# Altium PCB main.PcbDoc
Units mil, origin at the board's own origin, x right, y up, seen from the top; angles counter-clockwise.
Board outline 2720 x 2245 mil, 2 copper layers (Top Layer, Bottom Layer); 21 components, 31 nets, 106 pads, 2 vias.
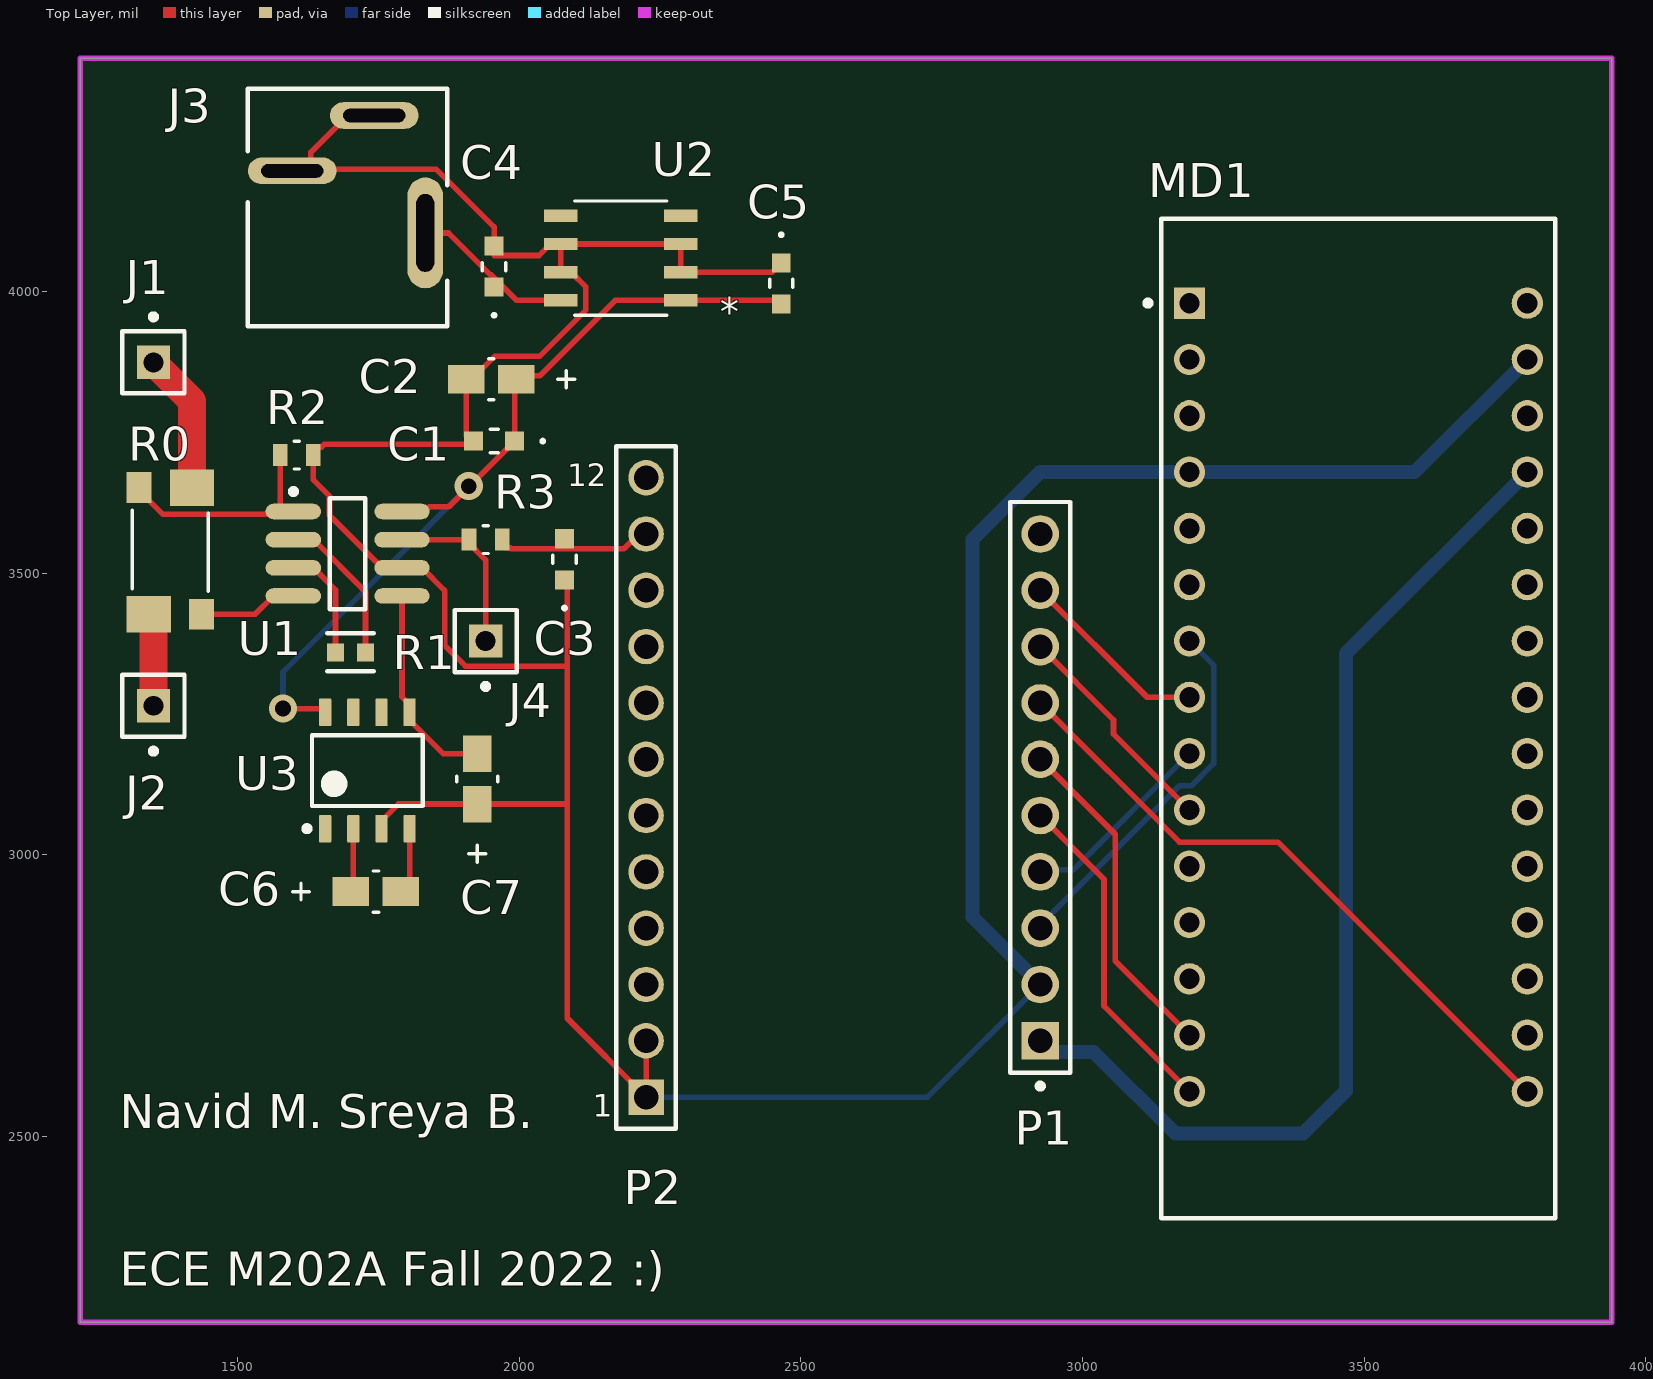
[diagram p0: Top Layer view]
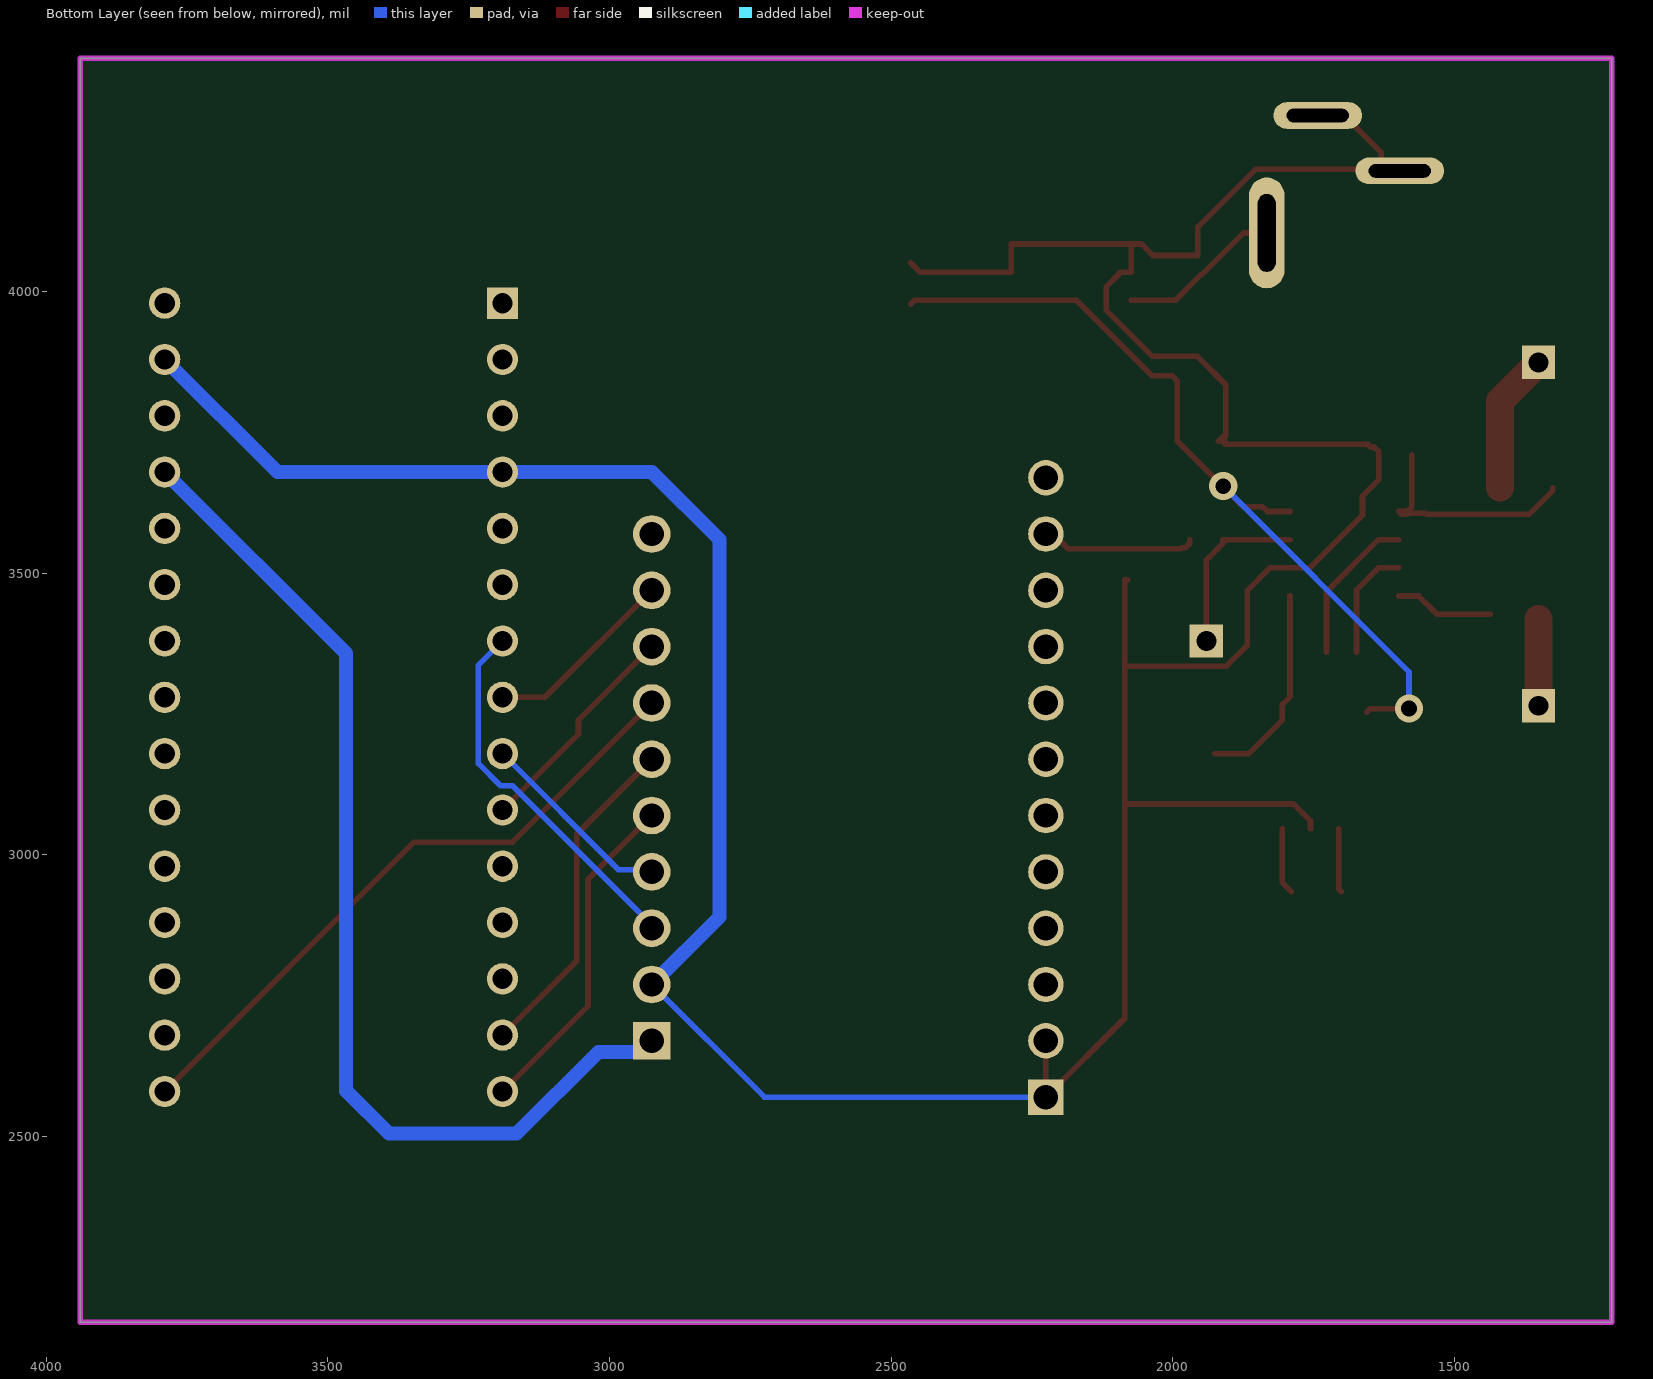
[diagram p1: Bottom Layer view, seen from below]
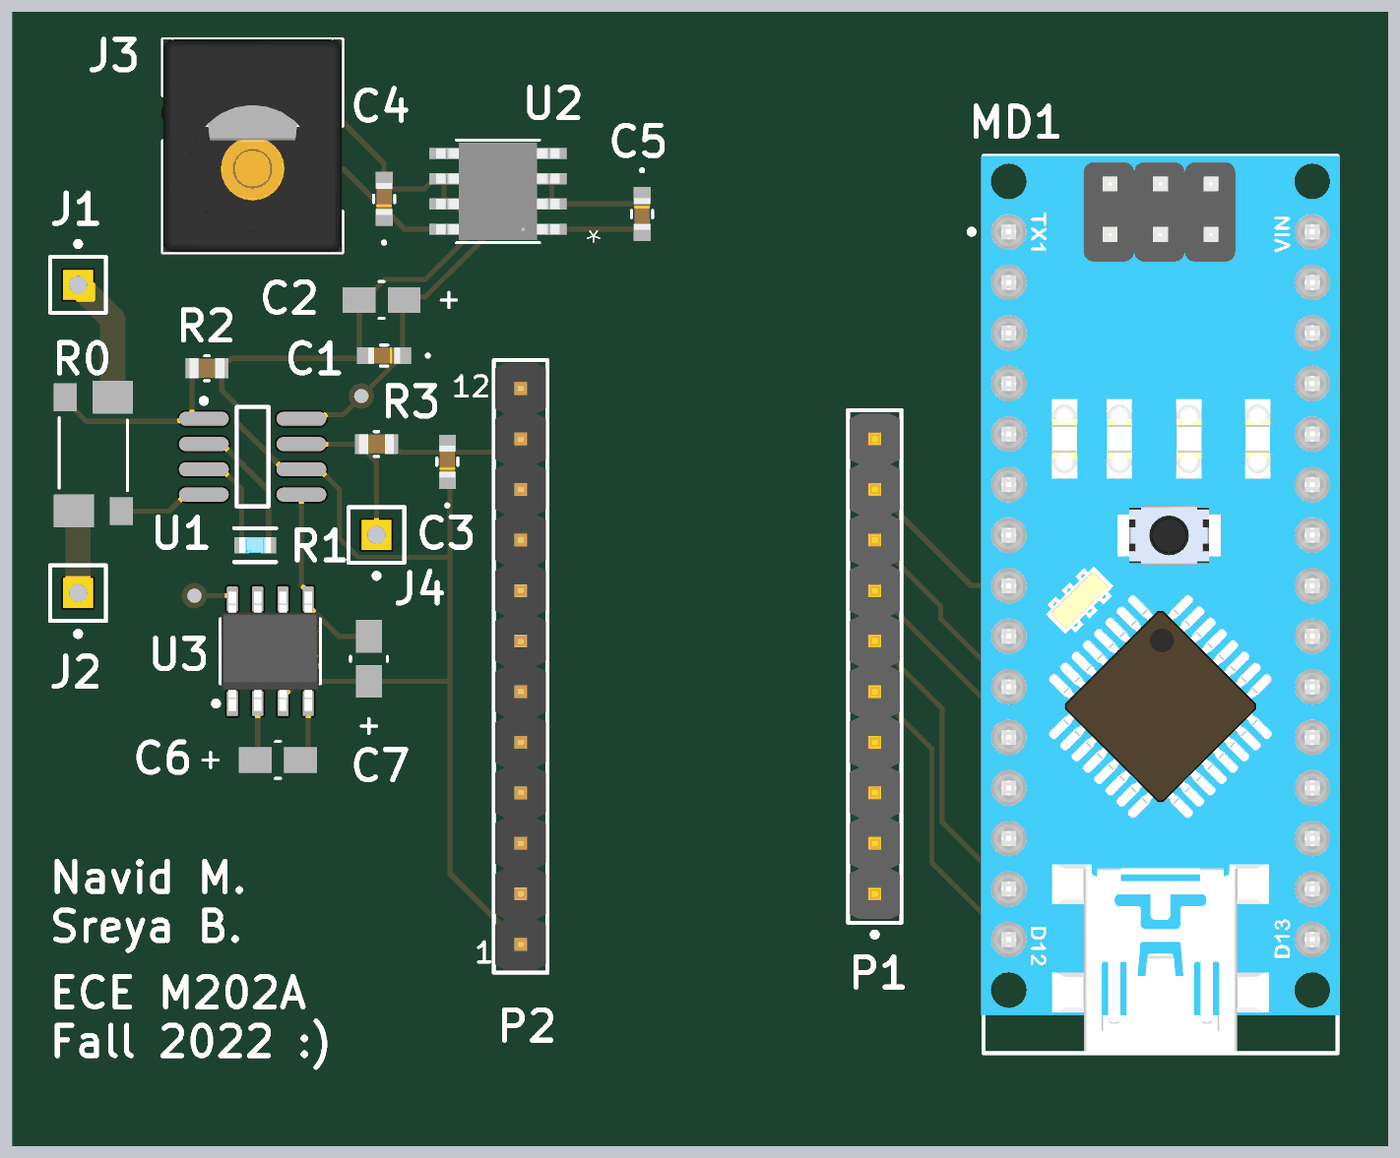
[diagram p2: 3D render of the assembled board from above, using the file's embedded part models]

## Layer stack, top to bottom
Top Solder: solder mask 0.4, Solder Resist, Dk 3.5
Top Layer: signal copper 1.4
Dielectric 1: dielectric 12.6, FR-4, Dk 4.8
Bottom Layer: signal copper 1.4
Bottom Solder: solder mask 0.4, Solder Resist, Dk 3.5

## Board outline
1220,2170 1220,4415 3940,4415 3940,2170

## Design rules (kind name [scope] priority, off if disabled: settings)
Clearance [All] p1: gap=10 ignorepadtopadclearanceinfootprint=FALSE except(0: Arc-Hole Track-Hole SMDPad-Hole THPad-Hole Via-Hole Fill-Hole Poly-Hole Region-Hole Text-Hole)
HoleSize [All] p1: absolutevalues=TRUE maxlimit=150 minlimit=1 maxpercent=80.000 minpercent=20.000
PolygonConnect [All] p1: connectstyle=Relief reliefconductorwidth=10 reliefentries=4 polygonreliefangle="90 Angle" airgapwidth=10
RoutingVias [All] p1: holewidth=28 width=50 viastyle="Through Hole" minholewidth=28 minwidth=50 maxholewidth=28 maxwidth=50
SolderMaskExpansion [All] p1: expansion=4 istentingtop=FALSE
Width [All] p1: maxlimit=100 minlimit=10 preferedwidth=10
29 further rules are at their usual default settings.

## Components (designator, comment, footprint, x,y, rotation, side; value= is the part's Value field where it differs from the comment)
C1 "0.1uF" CAP_0603M 1955,3735 r180 top
C2 "10uF" CAP_1206M 1950,3845 r180 top
C3 "1.5uF" CAP_0603M 2080,3525 r90 top
C4 "0.33uF" CAP_0603M 1955,4045 r90 top
C5 "0.1uF" CAP_0603M 2465,4015 r270 top
C6 "10uF" CAP_1206M 1745,2935 r0 top
C7 "10uF" CAP_1206M 1925,3135 r90 top
J1 "Socket" PIN1 1350,3875 r0 top
J2 "Socket" PIN1 1350,3265 r180 top
J3 "694106402002" 694106402002 1695,4150 r180 top
J4 "Socket" PIN1 1940,3380 r180 top
MD1 "A000005" FP-A000005-MFG 3490,3242.5 r0 top
P1 "61301011121" FP-61301011121-MFG 2925,3120 r90 top
P2 "61301211121" 61301211121 2225,3120 r90 top
R0 "0.01Ohm" Y1487B_VIS 1380,3540 r90 top
R1 "499R" FP-RK73H1J-IPC_C 1700,3360 r180 top
R2 "1K" RES_0603 1604.5,3710 r180 top
R3 "1K" RES_0603 1940,3560 r180 top
U1 "AD8221ARZ-R7" ADI-R-8_M 1695,3535 r0 top
U2 "MC78L09ACDR2G" SOIC8_ONS 2180,4060 r180 top
U3 "LMC7660IMX" D0008A_L 1730,3150 r90 top

## Footprints (in the part's own frame and the unit in brackets; to place one, negate y for a bottom-side part, rotate by r counter-clockwise, add the part's x,y. Pads: shape width x height; smd on the part's side, far side on the other; paste and mask are expansions set on the pad)
61301211121 [mm] "Pin Header, pitch 2.54 mm, THT, Vertical, single row, 12p"
  rect 1.6x1.6 hole 1.1: 1(-13.97,0)
  round 1.6 hole 1.1: 2(-11.43,0) 3(-8.89,0) 4(-6.35,0) 5(-3.81,0) 6(-1.27,0) 7(1.27,0) 8(3.81,0) 9(6.35,0) 10(8.89,0) 11(11.43,0) 12(13.97,0)
  silkscreen extent -15.39,-1.35 15.39,1.35, body extent -15.24,-1.27 15.24,1.27, height 8.57
694106402002 [mm] "DC Power Jack Vertical THT ?6.4"
  oval 1.6x5 hole 0.8 slot 3.5 at 90 deg: 1(-3.5,1.15)
  oval 4x1.2 hole 0.6 slot 2.8 at 0 deg: 2(-1.2,-4.15) 3(2.5,-1.65)
  silkscreen extent -4.5,-5.35 4.5,5.35, body extent -4.5,-5.35 4.5,5.35, height 14.1
ADI-R-8_M [mm] "SOIC, 8-Leads, Body 4.9x3.9mm, Pitch 1.27mm, IPC Low Density"
  oval 2.5x0.7 smd: 1(-2.45,1.905) 2(-2.45,0.635) 3(-2.45,-0.635) 4(-2.45,-1.905) 5(2.45,-1.905) 6(2.45,-0.635) 7(2.45,0.635) 8(2.45,1.905)
  silkscreen extent -2.57,-2.5 0.8,2.93, body extent -2,-2.5 2,2.5, height 1.75
CAP_0603M [mil]
  rect 33.81x33.5 smd paste+0 mask+0: 1(-36.59,0) 2(36.59,0)
  silkscreen extent -89,-21 7,21, body extent -31,-16 31,16, height 35
CAP_1206M [mm]
  rect 1.646x1.3 smd paste+0 mask+0: 1(-1.131,0) 2(1.131,0)
  silkscreen extent -3.76,-0.93 0.12,0.93, body extent 0,0 0.25,0.25, height 0.25
D0008A_L [mm] "SOIC, 8-Leads, Body 5x4mm, Pitch 1.27mm, IPC High Density"
  rrect18% 1.25x0.55 smd: 1(-2.625,1.905) 2(-2.625,0.635) 3(-2.625,-0.635) 4(-2.625,-1.905) 5(2.625,-1.905) 6(2.625,-0.635) 7(2.625,0.635) 8(2.625,1.905)
  silkscreen extent -2.75,-2.5 1.6,2.85, body extent -3,-2.45 3,2.45, height 1.63
FP-61301011121-MFG [mm]
  rect 1.7x1.7 hole 1.1 paste-1000 mask+0: 1(-11.43,0)
  round 1.7 hole 1.1 paste-1000 mask+0: 2(-8.89,0) 3(-6.35,0) 4(-3.81,0) 5(-1.27,0) 6(1.27,0) 7(3.81,0) 8(6.35,0) 9(8.89,0) 10(11.43,0)
  silkscreen extent -13.6,-1.35 12.88,1.35, body extent -12.98,-1.45 12.98,1.45, height 0.25
FP-A000005-MFG [mil]
  rect 55.67x55.67 hole 35.98 paste-39370.1 mask+0: 1(-300,737.5)
  round 55.67 hole 35.98 paste-39370.1 mask+0: 2(-300,637.5) 3(-300,537.5) 4(-300,437.5) 5(-300,337.5) 6(-300,237.5) 7(-300,137.5) 8(-300,37.5) 9(-300,-62.5) 10(-300,-162.5) 11(-300,-262.5) 12(-300,-362.5) 13(-300,-462.5) 14(-300,-562.5) 15(-300,-662.5) 16(300,-662.5) 17(300,-562.5) 18(300,-462.5) 19(300,-362.5) 20(300,-262.5) 21(300,-162.5) 22(300,-62.5) 23(300,37.5) 24(300,137.5) 25(300,237.5) 26(300,337.5) 27(300,437.5) 28(300,537.5) 29(300,637.5) 30(300,737.5)
  silkscreen extent -379,-888 350,888, body extent -354,-891 354,891, height 10
FP-RK73H1J-IPC_C [mil]
  rect 29.75x31.97 smd paste+0 mask+0: 1(-26.59,0) 2(26.59,0)
  silkscreen extent -41,-33 41,33, body extent -45,-22 45,22, height 10
PIN1 [mm] "Connector; Plug"
  rect 1.5x1.5 hole 0.9: 1(0,0)
  silkscreen extent -1.4,-1.4 1.4,2.17
RES_0603 [mil]
  rect 26x39 smd paste+0 mask+0: 1(-29.5,0) 2(29.5,0)
  silkscreen extent -4,-24 4,24, body extent -34,-19 34,19, height 30
SOIC8_ONS [mil]
  rect 59x22 smd paste+0 mask+0: 1(-106.5,75) 2(-106.5,25) 3(-106.5,-25) 4(-106.5,-75) 5(106.5,-75) 6(106.5,-25) 7(106.5,25) 8(106.5,75)
  silkscreen extent -82,-102 82,102, body extent -122,-96 122,96, height 69
Y1487B_VIS [mil]
  rect 65x79 smd paste+0 mask+0: 1(-112.5,38.5) 4(112.5,-38.5)
  rect 55x45 smd paste+0 mask+0: 2(-112.5,-55.5) 3(112.5,55.5)
  silkscreen extent -72,-68 72,68, body extent 0,0 10,10, height 10

## Part data
C1 C5: library part CAP_0603M, "0.1uF 0603", Manufacturer_Part_Number=0603YC683KAT2A, Mfr_Name="KYOCERA AVX", Copyright="Copyright (C) 2022 Ultra Librarian. All rights reserved.", RefDes=RefDes, Type=DEV
C2 C6 C7: library part CAP_1206M, "No Description Available", Manufacturer_Part_Number=SMC1206K183, Mfr_Name="NTE Electronics", Copyright="Copyright (C) 2022 Ultra Librarian. All rights reserved.", Digi-Key_Part_Number_1=2368-SMC1206K183-ND, RefDes=RefDes, Type=DEV
C3: library part CAP_0603M, "1.5uF 0603", Manufacturer_Part_Number=0603YC683KAT2A, Mfr_Name="KYOCERA AVX", Copyright="Copyright (C) 2022 Ultra Librarian. All rights reserved.", RefDes=RefDes, Type=DEV
C4: library part CAP_0603M, "0.33uF 0603", Manufacturer_Part_Number=0603YC683KAT2A, Mfr_Name="KYOCERA AVX", Copyright="Copyright (C) 2022 Ultra Librarian. All rights reserved.", RefDes=RefDes, Type=DEV
J3: library part CMP-1502-00189-1, "DC Power Jack Connector WR-DC, Male, Vertical, THT, 3 A, 20 V", Manufacturer="Wurth Elektronik", Operating Temperature=-40to85degC, Rated Current=3A, Working Voltage=20V, Datasheet URL=http://katalog.we-online.de/em/datasheet/6941xx402002.pdf, Gender=Male, Manufacturer URL=http://www.we-online.de, Mounting Technology=THT, Opening Diameter=6.4mm, Orientation=Vertical, Package Reference=694106402002, Packaging=Bag, Part Number=694106402002, Plug Inner Diameter=2.05mm, Plug Outer Diameter=5.5mm, Publisher=WurthElektronik
MD1: library part CMP-189986-000002-1, "ARDUINO NANO ATMEGA328 EVAL BRD", Operating Supply Voltage=12V, Package Quantity=50, Core Architecture=AVR, Data Bus Width=8b, Evaluation Kit=Yes, Height=0.25inch, Interface=I2C, Length=7inch, Number of Bits=8, Packaging=Bulk, REACH SVHC="No SVHC", Series="AVR® ATmega", Weight=0.358383oz, Width=5inch
P1: library part CMP-1502-01082-3, "CONN HEADER VERT 10POS 2.54MM", Color=Black, Current Rating=3A, Flammability Rating="UL94 V-0", Insulation Resistance=1GR, Max Operating Temperature=105°C, Min Operating Temperature=-40°C, Package Quantity=1000, Voltage Rating=250V, Connector Type=Header, Contact Finish - Mating=GOLD, Contact Gender=Male, Contact Material="Copper Alloy", Contact Mating Length=0.236inch, Contact Plating=Gold, Contact Shape=Square, Contact Type="Male Pin", Fastening Type=Pull, Gender=Male, Height=11.54mm, Housing Material=PBT, Insulation Color=Black, Insulation Material=Nylon, Length=2.54mm, Mount="Through Hole", Number of Contacts=10, Number of Positions=10, Number of Rows=1, Orientation=Straight, Packaging=Bulk, Pitch=2.54mm, RoHS Compliant=Yes, Series=WR-PHD, Termination=Solder, Width=25.4mm
P2: library part CMP-1502-01086-1, "THT Vertical Pin Header WR-PHD, Pitch 2.54 mm, Single Row, 12 pins", Contact Resistance=20mOhm, Manufacturer="Wurth Elektronik", Operating Temperature=-40to105degC, Rated Current=3A, Withstanding Voltage=500VAC, Working Voltage=250VAC, Datasheet URL=https://katalog.we-online.de/em/datasheet/6130xx11121.pdf, Gender=Male, Manufacturer URL=http://www.we-online.de, Mounting Technology=THT, Orientation=Vertical, Package Reference=61301211121, Packaging=Bag, Part Number=61301211121, Pin Number=12, Pitch=2.54mm, Publisher=WurthElektronik, Row Number=Single
R0: library part Y14870R01000B9W, "Y14870R01000B9W", Mfr_Name=Vishay, Copyright="Copyright (C) 2022 Ultra Librarian. All rights reserved.", Digi-Key_Part_Number_1=Y1487-.01-ND, Manufacturer_Part_Number=Y14870R01000B9W, RefDes=RefDes, Type=DEV
R1: library part CMP-04015-097818-1, "499Ω ±0.5% 0.125W Chip Resistor 0603 Flat Chip (Anti-Sulfuration) AEC-Q200 Qualified", Case Code (Imperial)=0603, Case Code (Metric)=1608, Max Operating Temperature=155°C, Min Operating Temperature=-55°C, Package Quantity=5000, Power Rating=100mW, Temperature Coefficient=100ppm/°C, Tolerance=0.5%, Voltage Rating=75V, Case/Package=0603, Height=0.45mm, Length=1.6mm, Packaging="Tape and Reel", Resistance=499R, RoHS Compliant=Yes, Termination=SMD/SMT, Weight=7.1E-05oz, Width=0.8mm
R2 R3: library part RES_0603M, "1K 0603", Manufacturer_Part_Number=73L2R56J, Mfr_Name="CTS Components", Copyright="Copyright (C) 2022 Ultra Librarian. All rights reserved.", Digi-Key_Part_Number_1=73L2R56JTR-ND, Digi-Key_Part_Number_2=73L2R56JCT-ND, Digi-Key_Part_Number_3=73L2R56JDKR-ND, RefDes=RefDes, Type=DEV
U1: library part CMP-0934-00044-1, "Precision Instrumentation Amplifier, 2 V/us, -40 to 125 degC, 8-Pin SOIC (R-8), RoHS, Tape and Reel", Manufacturer="Analog Devices", Quiescent Current="0.9 mA Typ.", Temperature Range="-40 to 125 degC", -3dB Bandwidth@G="1=825 kHz", ComponentLink1Description="Manufacturer URL", ComponentLink1URL=http://www.analog.com/en/index.html, ComponentLink2Description=Datasheet, ComponentLink2URL=http://www.analog.com/static/imported-files/data_sheets/AD8221.pdf, ComponentLink3Description="Package Specification", ComponentLink3URL=http://www.analog.com/static/imported-files/packages/PKG_PDF/SOIC_Narrow%20(R)/R_8.pdf, DatasheetVersion="Rev. C", Mounting Technology="Surface Mount", PackageDescription="8-Pin Standard Small Outline Package, Body 4.9 x 3.9 mm, Pitch 1.27 mm", PackageVersion=Jun-06, Packing="Tape and Reel", PartNumber=AD8221ARZ-R7, RoHS=TRUE, Slew Rate@G="1=2 V/us Typ.", VIO="60 uV Max."
U2: "No Description Available", Mfr_Name=onsemi, Copyright="Copyright (C) 2022 Ultra Librarian. All rights reserved.", Digi-Key_Part_Number_1=MC78L09ACDR2GOSCT-ND, Digi-Key_Part_Number_2=MC78L09ACDR2GOSDKR-ND, Digi-Key_Part_Number_3=MC78L09ACDR2GOSTR-ND, Digi-Key_Part_Number_4=2156-MC78L09ACDR2G-OS-ND, Manufacturer_Part_Number=MC78L09ACDR2G, RefDes=RefDes, Type=DEV
U3: library part CMP-0065-00033-3, "Switched Capacitor Voltage Converter, 8-pin Narrow SOIC", Manufacturer="Texas Instruments", PackageTopMarking=NSZXTT*LMC76*60IM, PowerWise=N, Code_IPC=SOIC127P600-8, Code_JEDEC=MS-012-AA, ComponentLink1Description="Datasheet URL", ComponentLink1URL=http://www.ti.com/general/docs/lit/getliterature.tsp?genericPartNumber=LMC7660&fileType=pdf, CompType="Switch Caps", PackageDescription="SOIC Narrow, 4.9 x 3.9 x 1.45mm, 8 Lead, 1.27mm Pitch", PackageReference=D0008A, PinCount=8, RoHS=N
J1 J2 J4: LatestRevisionDate=17-Jul-2002, LatestRevisionNote="Re-released for DXP Platform.", Publisher="Altium Limited"

## Via types
v1: diameter 50, hole 28, Top Layer to Bottom Layer, tented bottom, 1 vias
v2: diameter 50, hole 28, Top Layer to Bottom Layer, tented both sides, 1 vias

## Nets (pads, with @x,y where several pads share a name; then routed paths per layer and width w, separated by ;. In a path a pad name is that pad's centre, name@x,y a point inside that pad or via, vN(x,y) a via of type N, cw(c..) or ccw(c..) an arc to the next point about the centre after c; other vN are vias at no path point)
5V: MD1.27 P1.1 | length 1875.1
  Bottom Layer w25: P1.1 2944.7,2650.3 3019.73,2650.3 3165.03,2505 3391.87,2505 3467.64,2580.77 3467.64,3357.64 MD1.27
5V_DUT: J1.1 R0.4 | length 250.9
  Top Layer w50: J1.1 1418.5,3806.5 R0.4
5V_PC: J2.1 R0.1 | length 166
  Top Layer w10: R0.1 R0.1@1350,3419
  Top Layer w50: J2.1 R0.1@1350,3419
9V0A: C1.1 C2.1 C5.2 U1.8 U2.1 U3.8 | length 1502.7
  Top Layer w10: v2(1580,3260) 1649.17,3260 1655,3254.17 U3.8 ; U1.8 1831.64,3610 1839.75,3618.11 1874.54,3618.11 1990.23,3733.79 C1.1@1990.54,3733.79 ; C1.1 1991.59,3842.06 2000.32,3850.79 2036.07,3850.79 2170.28,3985 U2.1 2458.41,3985 C5.2
  Bottom Layer w10: v2(1580,3260) 1580,3325 v1(1910,3655)
12V0: C4.1 J3.1 U2.8 | length 290.3
  Top Layer w10: J3.1 1874.06,4104.72 1948.63,4030.16 1950.16,4030.16 1955,4025.32 1995.32,3985 U2.8
-9V0A: C7.2 U1.5 U3.5 | length 370.9
  Top Layer w10: U1.5 1791.46,3280.67 1805,3267.13 U3.5 1805,3239.57 1865.04,3179.53 C7.2
AGND: C1.2 C2.2 C3.1 C4.2 C5.1 C7.1 J3.2 J3.3 MD1.4 MD1.29 P1.2 P2.1 P2.2 R2.1 U1.6 U2.2 U2.3 U2.6 U2.7 U3.3 | length 6920.8
  Top Layer w10: J3.3 1612.13,4214.96 1629.34,4232.17 1629.34,4247.72 1695,4313.39 J3.2 ; J3.3@1615.32,4218.15 1852.05,4218.15 1955,4115.2 C4.2 1955,4064.68 2034.68,4064.68 2055,4085 U2.6 ; U3.3 1755,3060.43 1785.04,3090.47 C7.1 2084.53,3090.47 2085,3090 ; C1.2@1906.79,3735 1906.79,3729.78 1906.5,3729.49 1653.49,3729.49 1648.5,3724.5 1642,3724.5 1634,3716.5 1634,3666.14 1662.76,3637.38 1662.76,3603.27 1756.02,3510 U1.6 1826.89,3510 1867.25,3469.64 1867.25,3372.48 1904.26,3335.47 2085,3335.47 ; C1.2@1906.79,3743.13 C1.2@1907.48,3743.13 ; C1.2@1908.54,3744.87 C1.2 1908.55,3735 1908.55,3742.16 1906.5,3744.21 1905.47,3744.21 1905.47,3779.03 1905.47,3835.15 1955.91,3885.59 2035.8,3885.59 2118,3967.79 2118,4009 2092,4035 U2.7 U2.6 ; C3.1@2080.16,3488.41 2085,3488.41 2085,3335.47 ; P2.2 P2.1 2085,2710 2085,3090 ; C5.1 2465,4051.43 2448.57,4035 U2.2 U2.3 U2.6 ; 2085,3090 2085,3335.47
  Bottom Layer w10: P2.1 2725,2570 P1.2
  Bottom Layer w25: P1.2 2805,2890 2805,3560 2925,3680 MD1.4 3590,3680 MD1.29
AIN0: P2.12
AIN1: C3.2 P2.11 R3.1 | length 276.9
  Top Layer w10: R3.1 1969.5,3553.5 1977.5,3545.5 1984,3545.5 1985.74,3543.76 2055,3543.76 2185.48,3543.76 2211.72,3570 P2.11
AIN2: P2.10
AIN3: P2.9
AIN4: P2.8
AIN5: P2.7
AIN6: P2.6
AIN7: P2.5
AIN8: P2.4
AIN9: P2.3
CS: MD1.10 P1.8 | length 399.8
  Top Layer w10: P1.8 3055.11,3239.89 3055.11,3214.89 MD1.10
DRDY: MD1.9 P1.4 | length 352
  Bottom Layer w10: P1.4 2928.85,2973.85 2983.85,2973.85 MD1.9
MISO: MD1.15 P1.5 | length 599.8
  Top Layer w10: P1.5 3038.2,2956.8 3038.2,2731.8 MD1.15
MOSI: MD1.14 P1.6 | length 599.8
  Top Layer w10: P1.6 3058.2,3036.8 3058.2,2811.8 MD1.14
NetC6_1: C6.1 U3.2 | length 113.5
  Top Layer w10: C6.1 1705,2939.53 U3.2
NetC6_2: C6.2 U3.4 | length 118.1
  Top Layer w10: C6.2 1805,2950.47 U3.4
NetJ4_1: J4.1 R3.2 U1.7 | length 311.3
  Top Layer w10: U1.7 R3.2 1910.5,3553.5 1940,3524 J4.1
NetR0_2: R0.2 U1.4 | length 176.5
  Top Layer w10: R0.2 1530.61,3427.5 1563.11,3460 U1.4
NetR0_3: R0.3 R2.2 U1.1 | length 418.9
  Top Layer w10: R0.3 1324.5,3647.5 1367,3605 1548.47,3605 1550.11,3606.64 1581.47,3606.64 1583.11,3605 1593.54,3605 U1.1 1593.54,3610 1583.11,3610 1575,3618.11 R2.2
NetR1_1: R1.1 U1.2 | length 273.8
  Top Layer w10: U1.2 1633.98,3560 1726.59,3467.39 R1.1
NetR1_2: R1.2 U1.3 | length 201.8
  Top Layer w10: U1.3 1633.98,3510 1673.41,3470.56 R1.2
PWDN: MD1.7 P1.3 | length 667.6
  Bottom Layer w10: P1.3 2925,2875.58 3172.26,3122.83 3193.41,3122.83 3232.83,3162.26 3232.83,3337.17 MD1.7
SCLK: MD1.16 P1.7 | length 1150.8
  Top Layer w10: P1.7 3172.17,3022.83 3347.17,3022.83 MD1.16
START: MD1.8 P1.9 | length 343.7
  Top Layer w10: P1.9 3115,3280 MD1.8
pads on no net: MD1.1 MD1.2 MD1.3 MD1.5 MD1.6 MD1.11 MD1.12 MD1.13 MD1.17 MD1.18 MD1.19 MD1.20 MD1.21 MD1.22 MD1.23 MD1.24 MD1.25 MD1.26 MD1.28 MD1.30 P1.10 U2.4 U2.5 U3.1 U3.6 U3.7

## Keep-outs
Keep-Out Layer:
  the board outline again, w10

## Silkscreen, mask and mechanical layers (free items; w line width, h text height)
Top Overlay:
  text "Navid M. Sreya B." at 1290,2515 h60
  text "ECE M202A Fall 2022 :)" at 1290,2235 h60

## Text inside footprints (layer, text, board x,y; h text height)
P2: Top Overlay "12" at 2085,3655 h40; Top Overlay "1" at 2130,2535 h40
U2: Top Overlay "*" at 2390,4010 h50 r180; Mechanical 13 "*" at 2254.5,4016.5 h50 r180